# EAGLE board ESE323- 100kHz Oscilloscope Project (EAGLE 9.7.0)
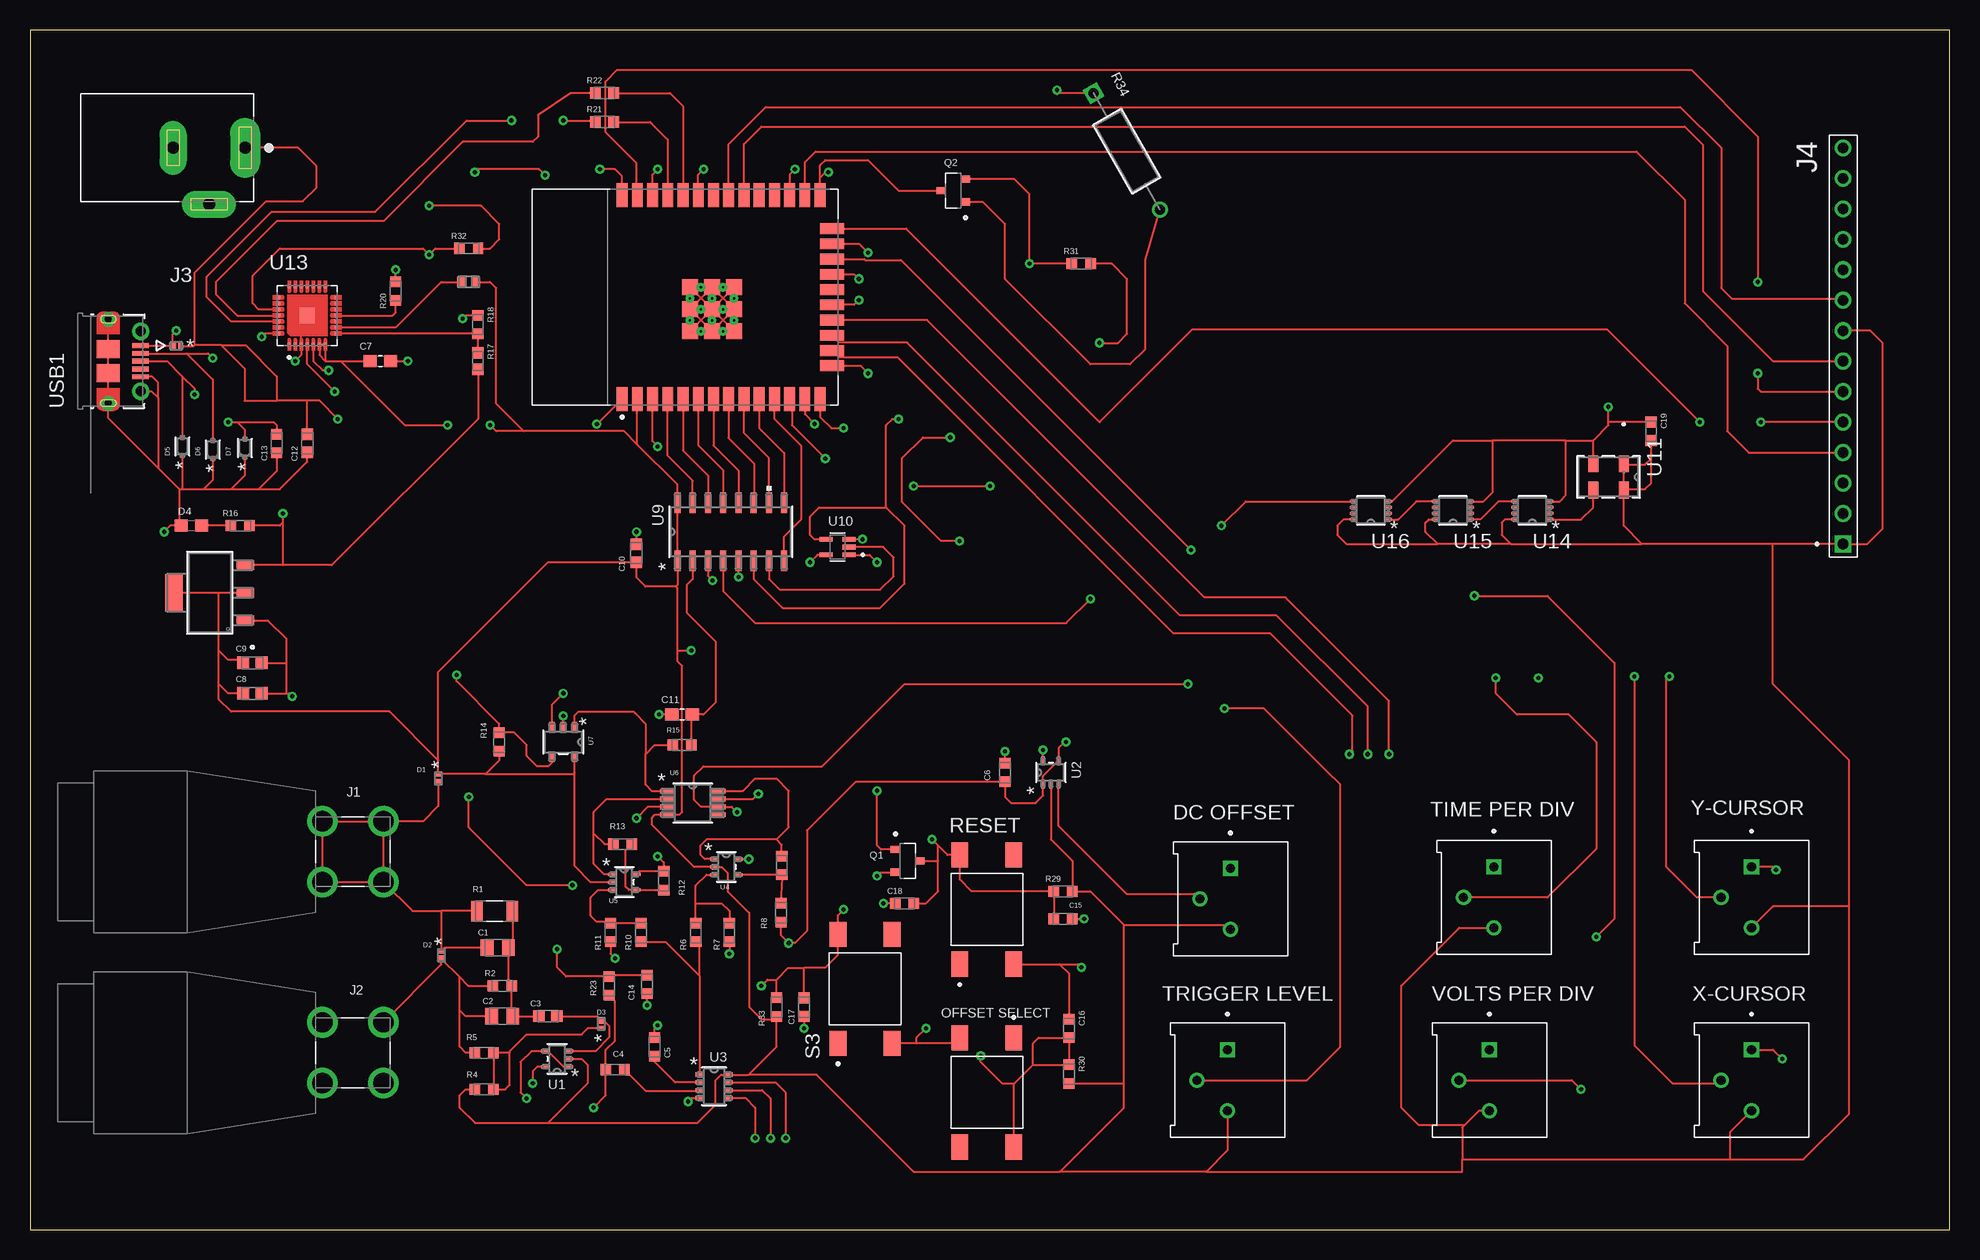
[diagram p0: board, top side]
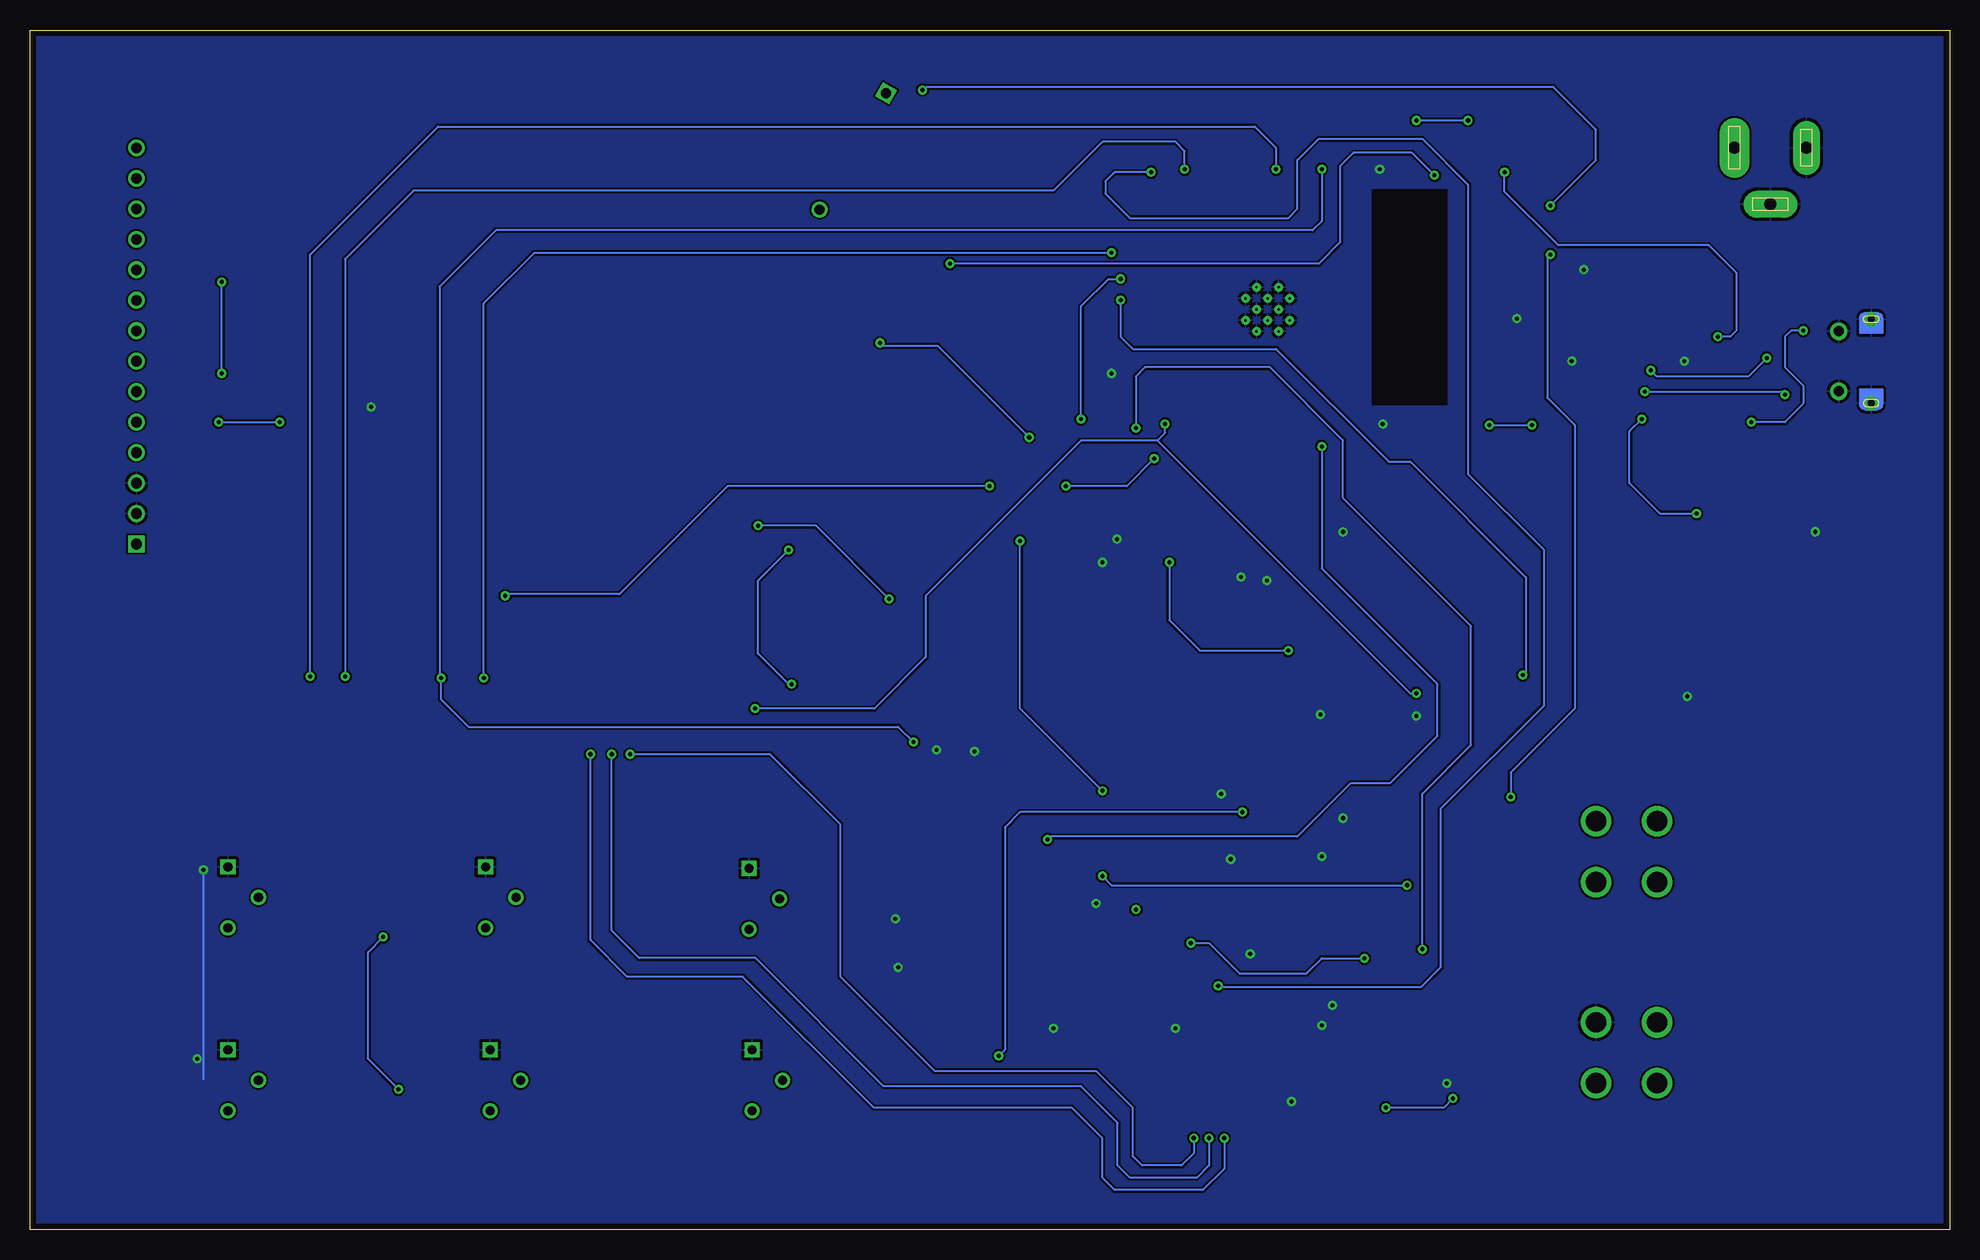
[diagram p1: board, bottom side, seen from below]

Size 160 x 100 mm. Coordinates in mm from the lower left corner, seen from the top.
Outline: 0,0 160,0 160,100 0,100 0,0
Copper layers (1*16): Top / Bottom
Stack-up Default Layer Stack: Top User Defined 0.035mm / Dielectric-1 User Defined 1.5mm / Bottom User Defined 0.035mm
Design rules: minimum copper width 6mil, minimum drill size 6mil, copper clearance wire_polygon to wire_polygon 6mil, copper clearance wire_polygon to pad_smd 6mil, copper clearance wire_polygon to via 6mil, copper clearance pad_smd to pad_smd 6mil, copper clearance pad_smd to via 6mil, copper clearance via to via 6mil, copper clearance smd to pad (same net) 6mil, copper clearance smd to via (same net) 6mil, copper clearance smd to smd (same net) 6mil, dimension clearance 20mil, restrict clearance 0mil, drill distance 6mil, keepout clearance 0mil

## Footprints (pad centres in the part's own frame; a part is rotated, then mirrored left to right if it is on the bottom)
GRM2165C2A102JA01D = smd 1.05 x 1.38: 1 -0.888,0; 2 0.888,0
GRM2195C1H912JA01D = smd 1.05 x 1.38: 1 -0.888,0; 2 0.888,0
GRM188R61A106ME69D = smd 0.96 x 0.97: 1 -0.755,0; 2 0.755,0
GCJ188R71H104KA12D = smd 0.89 x 0.93: 1 -0.77,0; 2 0.77,0
CAPC1608X90 = smd 1.1 x 1: 1 -0.85,0; 2 0.85,0
GRM188R60J476ME15J = smd 1 x 1.02: 1 -0.759,0; 2 0.759,0
CC0603JRNPO9BN501 = smd 1.1 x 1: 1 -0.85,0; 2 0.85,0
CR_NSR05_ONS-L = smd 0.406 x 0.508: 1 -0.368,0 | smd 0.559 x 0.508: 2 0.292,0
LTST-C191KRKT-0603 = smd 1.1 x 1: 1 -0.85,0; 2 0.85,0
D5V0L1B2T_7-SOD523_DIO-L = smd 0.402 x 0.299: 1 -0.751,0; 2 0.751,0
CALTEST_CT3151-2 = drill 1.7: 1 -2.54,2.54; 2 2.54,2.54; 3 -2.54,-2.54; 4 2.54,-2.54
CALTEST_CT3151-0 = drill 1.7: 1 -2.54,2.54; 2 2.54,2.54; 3 -2.54,-2.54; 4 2.54,-2.54
CUI_PJ-202A = drill 1 pad 2.5 long: 1 -6.5,0 | drill 1 pad 2.25 long: 2 -0.5,0; 3 -3.5,4.7
PPTC141LFBN-RC = drill 0.89 square: 1 -5.08,0 | drill 0.89: 2 -2.54,0; 3 0,0; 4 2.54,0; 5 5.08,0; 6 7.62,0; 7 10.16,0; 8 12.7,0; 9 15.24,0; 10 17.78,0; 11 20.32,0; 12 22.86,0; 13 25.4,0; 14 27.94,0
TRANS_SS8050-G = smd 0.8 x 0.6: 1 -1.01,0.95; 2 -1.01,-0.95; 3 1.01,0
RT1206CRE07900KL = smd 0.97 x 1.73: 1 -1.48,0; 2 1.48,0
ESR03EZPJ103 = smd 0.87 x 0.93: 1 -0.78,0; 2 0.78,0
TRIM_3386P-1-101TLF = drill 0.76 square: 1 -2.54,-0.015 | drill 0.76: 2 0,-2.555; 3 2.54,-0.015
ESR03EZPJ202 = smd 0.87 x 0.93: 1 -0.78,0; 2 0.78,0
RNCP0603FTD22K1 = smd 0.97 x 0.93: 1 -0.68,0; 2 0.68,0
RNCF0603DTE47K5 = smd 0.87 x 0.93: 1 -0.755,0; 2 0.755,0
STA_RNCP0603_STP-L = smd 0.711 x 0.838: 1 -0.597,0; 2 0.597,0
RMCF0603ZT0R00 = smd 0.9 x 0.97: 1 -0.76,0; 2 0.76,0
STA_CD14_STP = drill 0.838 pad 1.346 square: 1 0,0 | drill 0.838 pad 1.346: 2 11.176,0
SW_TS04-66-50-BK-260-SMT = smd 2.1 x 1.4: 1 -4.55,2.25; 2 -4.55,-2.25; 3 4.55,2.25; 4 4.55,-2.25
AD8565-L = smd 0.673 x 0.254: 1 -1.01,0.65; 2 -1.01,0; 3 -1.01,-0.65; 4 1.01,-0.65; 5 1.01,0.65
LTC6910-4-TSOT-23-L = smd 0.673 x 0.356: 1 -1.213,0.975; 2 -1.213,0.325; 3 -1.213,-0.325; 4 -1.213,-0.975; 5 1.213,-0.975; 6 1.213,-0.325; 7 1.213,0.325; 8 1.213,0.975
ADG1419-L = smd 1.206 x 0.4: 1 -2.124,0.975; 2 -2.124,0.325; 3 -2.124,-0.325; 4 -2.124,-0.975; 5 2.124,-0.975; 6 2.124,-0.325; 7 2.124,0.325; 8 2.124,0.975
LMV331-L = smd 0.802 x 0.449: 1 -1.251,0.95; 2 -1.251,0; 3 -1.251,-0.95; 4 1.251,-0.95; 5 1.251,0.95
AZ1117CH-3.3TRG1-SOT-223_DIO-L = smd 0.8 x 1.456: 1 -2.3,-2.974; 2 0,-2.974; 3 2.3,-2.974 | smd 3.1 x 1.456: 4 0,2.974
AD7819-L = smd 1.676 x 0.508: 1 -2.413,4.445; 2 -2.413,3.175; 3 -2.413,1.905; 4 -2.413,0.635; 5 -2.413,-0.635; 6 -2.413,-1.905; 7 -2.413,-3.175; 8 -2.413,-4.445; 9 2.413,-4.445; 10 2.413,-3.175; 11 2.413,-1.905; 12 2.413,-0.635; 13 2.413,0.635; 14 2.413,1.905; 15 2.413,3.175; 16 2.413,4.445
SN74LVC1G125DCKR-SOT65P210X110-5N = smd 1.19 x 0.4: 1 -0.96,0.65; 2 -0.96,0; 3 -0.96,-0.65; 4 0.96,-0.65; 5 0.96,0.65
CDFN4_5X3P2_MCH-L = smd 1.403 x 0.849: 1 -1.102,1.27; 2 -1.102,-1.27; 3 1.102,-1.27; 4 1.102,1.27
MODULE_ESP32-WROOM-32 = smd 2 x 0.9: 1 -8.5,5.26; 2 -8.5,3.99; 3 -8.5,2.72; 4 -8.5,1.45; 5 -8.5,0.18; 6 -8.5,-1.09; 7 -8.5,-2.36; 8 -8.5,-3.63; 9 -8.5,-4.9; 10 -8.5,-6.17; 11 -8.5,-7.44; 12 -8.5,-8.71; 13 -8.5,-9.98; 14 -8.5,-11.25; 25 8.5,-11.25; 26 8.5,-9.98; 27 8.5,-8.71; 28 8.5,-7.44; 29 8.5,-6.17; 30 8.5,-4.9; 31 8.5,-3.63; 32 8.5,-2.36; 33 8.5,-1.09; 34 8.5,0.18; 35 8.5,1.45; 36 8.5,2.72; 37 8.5,3.99; 38 8.5,5.26 | smd 0.9 x 2: 15 -5.715,-12.25; 16 -4.445,-12.25; 17 -3.175,-12.25; 18 -1.905,-12.25; 19 -0.635,-12.25; 20 0.635,-12.25; 21 1.905,-12.25; 22 3.175,-12.25; 23 4.445,-12.25; 24 5.715,-12.25 | smd 1.33 x 1.33: 39_1 -2.835,-0.405; 39_2 -1,-0.405; 39_3 0.835,-0.405; 39_4 -2.835,-2.24; 39_5 -1,-2.24; 39_6 0.835,-2.24; 39_7 -2.835,-4.075; 39_8 -1,-4.075; 39_9 0.835,-4.075 | drill 0.2 pad 0.3: 39_10 -1.917,-0.405; 39_11 -0.083,-0.405; 39_12 -2.835,-1.323; 39_13 -1,-1.323; 39_14 0.835,-1.323; 39_15 -1.917,-2.24; 39_16 -0.083,-2.24; 39_17 -2.835,-3.158; 39_18 -1,-3.158; 39_19 0.835,-3.158; 39_20 -1.917,-4.075; 39_21 -0.083,-4.075
IC_CP2102N-A02-GQFN28R = smd 0.25 x 0.25: 1 -2.4,1.5; 2 -2.4,1; 3 -2.4,0.5; 4 -2.4,0; 5 -2.4,-0.5; 6 -2.4,-1; 7 -2.4,-1.5; 8 -1.5,-2.4; 9 -1,-2.4; 10 -0.5,-2.4; 11 0,-2.4; 12 0.5,-2.4; 13 1,-2.4; 14 1.5,-2.4; 15 2.4,-1.5; 16 2.4,-1; 17 2.4,-0.5; 18 2.4,0; 19 2.4,0.5; 20 2.4,1; 21 2.4,1.5; 22 1.5,2.4; 23 1,2.4; 24 0.5,2.4; 25 0,2.4; 26 -0.5,2.4; 27 -1,2.4; 28 -1.5,2.4 | smd 1.27 x 1.27: 29 0,0
DCU8-L = smd 0.559 x 0.203: 1 -1.473,0.75; 2 -1.473,0.25; 3 -1.473,-0.25; 4 -1.473,-0.75; 5 1.473,-0.75; 6 1.473,-0.25; 7 1.473,0.25; 8 1.473,0.75
MOLEX_1050170001 = smd 0.4 x 1.35: 1 -1.3,4.125; 2 -0.65,4.125; 3 0,4.125; 4 0.65,4.125; 5 1.3,4.125 | drill 0.85 pad 1.45: SH1 -2.5,4.15; SH2 2.5,4.15 | drill 0.6 pad 1.2: SH3 -3.5,1.45; SH6 3.5,1.45 | smd 1.5 x 1.9: SH4 -1,1.45; SH5 1,1.45

## Placement (x,y rotation side)
C1  GRM2165C2A102JA01D  [GRM2165C2A102JA01D]  38.99,23.5 0 top
C2  GRM2195C1H912JA01D  [GRM2195C1H912JA01D]  39.37,17.78 0 top
C3  GRM188R61A106ME69D  [GRM188R61A106ME69D]  43.18,17.78 0 top
C4  GCJ188R71H104KA12D  [GCJ188R71H104KA12D]  48.77,13.34 0 top
C5  GRT188R61H105KE13D  [GCJ188R71H104KA12D]  52.07,15.24 270 top
C6  GCJ188R71H104KA12D  [GCJ188R71H104KA12D]  81.28,38.1 270 top
C7  C0603C475K9PACTU  [CAPC1608X90]  29.21,72.39 0 top
C8  GRM188R60J476ME15J  [GRM188R60J476ME15J]  18.54,44.7 180 top
C9  GRM188R60J476ME15J  [GRM188R60J476ME15J]  18.54,47.24 180 top
C10  GRM188R61A106ME69D  [GRM188R61A106ME69D]  50.55,56.39 270 top
C11  CC0603JRNPO9BN501  [CC0603JRNPO9BN501]  54.36,42.93 0 top
C12  GRM188R61A106ME69D  [GRM188R61A106ME69D]  23.11,65.53 90 top
C13  GCJ188R71H104KA12D  [GCJ188R71H104KA12D]  20.57,65.53 90 top
C14  GCJ188R71H104KA12D  [GCJ188R71H104KA12D]  51.44,20.45 90 top
C15  GCJ188R71H104KA12D  [GCJ188R71H104KA12D]  86.11,25.91 180 top
C16  GCJ188R71H104KA12D  [GCJ188R71H104KA12D]  86.61,16.76 270 top
C17  GCJ188R71H104KA12D  [GCJ188R71H104KA12D]  64.52,18.54 90 top
C18  GCJ188R71H104KA12D  [GCJ188R71H104KA12D]  72.9,27.18 0 top
C19  GCJ188R71H104KA12D  [GCJ188R71H104KA12D]  135.13,66.55 270 top
D1  NSR05F40NXT5GCR_NSR05_ONS-L  [CR_NSR05_ONS-L]  34.04,37.59 270 top
D2  NSR05F40NXT5GCR_NSR05_ONS-L  [CR_NSR05_ONS-L]  34.29,22.86 270 top
D3  NSR05F40NXT5GCR_NSR05_ONS-L  [CR_NSR05_ONS-L]  47.62,17.14 90 top
D4  LTST-C191KRKT  [LTST-C191KRKT-0603]  13.46,58.67 0 top
D5  D5V0L1B2T-7SOD523_DIO-L  [D5V0L1B2T_7-SOD523_DIO-L]  12.7,65.28 90 top
D6  D5V0L1B2T-7SOD523_DIO-L  [D5V0L1B2T_7-SOD523_DIO-L]  15.24,65.02 90 top
D7  D5V0L1B2T-7SOD523_DIO-L  [D5V0L1B2T_7-SOD523_DIO-L]  17.91,65.15 90 top
D8  NSR05F40NXT5GCR_NSR05_ONS-L  [CR_NSR05_ONS-L]  12.19,73.66 180 top
J1  CT3151-2  [CALTEST_CT3151-2]  26.92,31.5 270 top
J2  CT3151-0  [CALTEST_CT3151-0]  26.92,14.73 270 top
J3  PJ-202A  [CUI_PJ-202A]  11.43,90.17 180 top
J4  PPTC141LFBN-RC  [PPTC141LFBN-RC]  151.13,62.23 90 top
Q1  SS8050-G  [TRANS_SS8050-G]  73.15,30.73 0 top
Q2  SS8050-G  [TRANS_SS8050-G]  76.96,86.61 180 top
R1  RT1206CRE07900KL  [RT1206CRE07900KL]  38.73,26.54 0 top
R2  ESR03EZPJ104  [ESR03EZPJ103]  39.37,20.32 0 top
R3  3386P-1-101TLF  [TRIM_3386P-1-101TLF]  100.08,27.56 270 top
R4  ESR03EZPJ103  [ESR03EZPJ103]  37.85,11.68 180 top
R5  ESR03EZPJ103  [ESR03EZPJ103]  37.85,14.73 0 top
R6  ESR03EZPJ103  [ESR03EZPJ103]  55.5,24.77 90 top
R7  ESR03EZPJ103  [ESR03EZPJ103]  58.29,24.77 90 top
R8  ESR03EZPJ103  [ESR03EZPJ103]  62.61,26.42 90 top
R9  ESR03EZPJ103  [ESR03EZPJ103]  62.67,30.35 90 top
R10  ESR03EZPJ103  [ESR03EZPJ103]  50.93,24.77 90 top
R11  ESR03EZPJ103  [ESR03EZPJ103]  48.39,24.77 90 top
R12  ESR03EZPJ103  [ESR03EZPJ103]  52.83,29.08 270 top
R13  ESR03EZPJ103  [ESR03EZPJ103]  49.4,32.13 180 top
R14  RT0603DRE075K1L  [ESR03EZPJ103]  39.12,40.64 270 top
R15  ESR03EZPJ302  [ESR03EZPJ103]  54.36,40.39 0 top
R16  ESR03EZPJ202  [ESR03EZPJ202]  17.53,58.67 0 top
R17  RNCP0603FTD22K1  [RNCP0603FTD22K1]  37.34,72.39 270 top
R18  RNCF0603DTE47K5  [RNCF0603DTE47K5]  37.34,75.44 270 top
R19  RNCP0603FTD1K00STA_RNCP0603_STP-L  [STA_RNCP0603_STP-L]  36.58,78.99 0 top
R20  ESR03EZPJ103  [ESR03EZPJ103]  30.48,78.23 90 top
R21  RMCF0603ZT0R00  [RMCF0603ZT0R00]  47.88,92.33 0 top
R22  RMCF0603ZT0R00  [RMCF0603ZT0R00]  47.88,94.74 0 top
R23  ESR03EZPJ104  [ESR03EZPJ103]  48.26,20.32 270 top
R24  3386P-1-101TLF  [TRIM_3386P-1-101TLF]  121.67,12.45 270 top
R25  3386P-1-101TLF  [TRIM_3386P-1-101TLF]  122.05,27.69 270 top
R26  3386P-1-101TLF  [TRIM_3386P-1-101TLF]  99.82,12.45 270 top
R27  3386P-1-101TLF  [TRIM_3386P-1-101TLF]  143.51,12.45 270 top
R28  3386P-1-101TLF  [TRIM_3386P-1-101TLF]  143.51,27.69 270 top
R29  ESR03EZPJ103  [ESR03EZPJ103]  86.11,28.19 0 top
R30  ESR03EZPJ103  [ESR03EZPJ103]  86.61,12.95 270 top
R31  ESR03EZPJ103  [ESR03EZPJ103]  87.63,80.52 0 top
R32  ESR03EZPJ103  [ESR03EZPJ103]  36.58,81.79 0 top
R33  ESR03EZPJ103  [ESR03EZPJ103]  62.23,18.54 270 top
R34  CD14ZT0R00STA_CD14_STP  [STA_CD14_STP]  88.65,94.74 299.7 top
RESET  TS04-66-50-BK-260-SMT  [SW_TS04-66-50-BK-260-SMT]  79.76,26.67 90 top
S2  TS04-66-50-BK-260-SMT  [SW_TS04-66-50-BK-260-SMT]  79.76,11.43 270 top
S3  TS04-66-50-BK-260-SMT  [SW_TS04-66-50-BK-260-SMT]  69.6,20.07 90 top
U1  AD8565AKSZ-REEL7KS_5_ADI-L  [AD8565-L]  43.94,14.22 180 top
U2  AD8565AKSZ-REEL7KS_5_ADI-L  [AD8565-L]  85.09,38.1 90 top
U3  LTC6910-3CTS8TRMPBFTSOT-23_TS8_LIT-L  [LTC6910-4-TSOT-23-L]  57.02,11.94 0 top
U4  AD8565AKSZ-REEL7KS_5_ADI-L  [AD8565-L]  58.04,30.23 0 top
U5  AD8565AKSZ-REEL7KS_5_ADI-L  [AD8565-L]  49.53,28.96 0 top
U6  ADG1419BRMZ-REEL7RM_8_ADI-L  [ADG1419-L]  55.24,35.56 0 top
U7  LMV331W5-7SOT25_DIO-L  [LMV331-L]  44.45,40.64 270 top
U8  AZ1117CH-3.3TRG1SOT-223_DIO-L  [AZ1117CH-3.3TRG1-SOT-223_DIO-L]  14.99,53.09 90 top
U9  AD7819YRZR_16_ADI-L  [AD7819-L]  58.42,58.17 90 top
U10  SN74LVC1G125DCKR  [SN74LVC1G125DCKR-SOT65P210X110-5N]  67.31,56.9 180 top
U11  DSC1001BE2-001.6000CDFN4_5X3P2_MCH-L  [CDFN4_5X3P2_MCH-L]  131.57,62.74 270 top
U12  ESP32-WROOM-32  [MODULE_ESP32-WROOM-32]  54.61,77.72 90 top
U13  CP2102N-A02-GQFN28R  [IC_CP2102N-A02-GQFN28R]  23.11,76.2 90 top
U14  SN74LVC2G74DCURDCU8-L  [DCU8-L]  125.22,59.94 180 top
U15  SN74LVC2G74DCURDCU8-L  [DCU8-L]  118.62,59.94 180 top
U16  SN74LVC2G74DCURDCU8-L  [DCU8-L]  111.76,59.94 180 top
USB1  1050170001  [MOLEX_1050170001]  5.08,72.39 270 top

## Library data of the parts
C1 = ESE323_Project_Library; CHECK_PRICES: https://www.snapeda.com/parts/GRM2165C2A102JA01D/Murata+Electronics+North+America/view-part/?ref=eda; DESCRIPTION: 0805 1000 pF 100 V ±5% Tolerance C0G Multilayer Ceramic Capacitor; DIGIKEY_PART_NUMBER: 490-6445-2-ND; MF: Murata Electronics; MP: GRM2165C2A102JA01D; PACKAGE: 2012 Murata; PURCHASE-URL: https://www.snapeda.com/api/url_track_click_mouser/?unipart_id=1837721&manufacturer=Murata Electronics&part_name=GRM2165C2A102JA01D&search_term=None; SNAPEDA_LINK: https://www.snapeda.com/parts/GRM2165C2A102JA01D/Murata+Electronics+North+America/view-part/?ref=snap
C2 J2 R1 R2 R4-R13 R20 R23 R29-R33 = ESE323_Project_Library
C3 C10 C12 = ESE323_Project_Library; CHECK_PRICES: https://www.snapeda.com/parts/GRM188R61A106ME69D/Murata+Electronics+North+America/view-part/?ref=eda; DESCRIPTION: SMD capacitor X5R(EIA) with capacitance 10uF Tol.20%. Rated voltage 10Vdc 85C; DIGIKEY_PART_NUMBER: 490-10475-2-ND; MF: Murata; MP: GRM188R61A106ME69D; PACKAGE: 1608 Murata; PURCHASE-URL: https://www.snapeda.com/api/url_track_click_mouser/?unipart_id=589707&manufacturer=Murata&part_name=GRM188R61A106ME69D&search_term=None; SNAPEDA_LINK: https://www.snapeda.com/parts/GRM188R61A106ME69D/Murata+Electronics+North+America/view-part/?ref=snap
C4 C6 C13-C19 = ESE323_Project_Library; CHECK_PRICES: https://www.snapeda.com/parts/GCJ188R71H104KA12D/Murata+Electronics+North+America/view-part/?ref=eda; DESCRIPTION: 0.1 µF ±10% 50V Ceramic Capacitor X7R 0603 (1608 Metric); DIGIKEY_PART_NUMBER: 490-5798-2-ND; MF: Murata Electronics; MP: GCJ188R71H104KA12D; PACKAGE: 1608 Murata; PURCHASE-URL: https://www.snapeda.com/api/url_track_click_mouser/?unipart_id=667734&manufacturer=Murata Electronics&part_name=GCJ188R71H104KA12D&search_term=None; SNAPEDA_LINK: https://www.snapeda.com/parts/GCJ188R71H104KA12D/Murata+Electronics+North+America/view-part/?ref=snap
C5 = ESE323_Project_Library; CHECK_PRICES: https://www.snapeda.com/parts/GRT188R61H105KE13D/Murata+Electronics+North+America/view-part/?ref=eda; DESCRIPTION: 1 µF ±10% 50V Ceramic Capacitor X5R 0603 (1608 Metric); DIGIKEY_PART_NUMBER: 490-12330-2-ND; MF: Murata; MP: GRT188R61H105KE13D; PACKAGE: 1608 Murata; PURCHASE-URL: https://www.snapeda.com/api/url_track_click_mouser/?unipart_id=1767599&manufacturer=Murata&part_name=GRT188R61H105KE13D&search_term=None; SNAPEDA_LINK: https://www.snapeda.com/parts/GRT188R61H105KE13D/Murata+Electronics+North+America/view-part/?ref=snap
C7 = ESE323_Project_Library; CHECK_PRICES: https://www.snapeda.com/parts/C0603C475K9PACTU/KEMET/view-part/?ref=eda; DESCRIPTION: 0603 C 4.7uF Ceramic Multilayer Capacitor, 6.3 VDC, +85degC, X5R Dielec, +/-10% | KEMET C0603C475K9PACTU; MF: KEMET; MP: C0603C475K9PACTU; PACKAGE: 0603 Kemet; SNAPEDA_LINK: https://www.snapeda.com/parts/C0603C475K9PACTU/KEMET/view-part/?ref=snap
C8 C9 = ESE323_Project_Library; CHECK_PRICES: https://www.snapeda.com/parts/GRM188R60J476ME15J/Murata/view-part/?ref=eda; DESCRIPTION: SMD capacitor X5R(EIA) with capacitance 47uF Tol.20%. Rated voltage 6.3Vdc 85C; DIGIKEY_PART_NUMBER: 490-GRM188R60J476ME15JTR-ND; MF: Murata; MP: GRM188R60J476ME15J; PACKAGE: 1608 Murata; PURCHASE-URL: https://www.snapeda.com/api/url_track_click_mouser/?unipart_id=1988705&manufacturer=Murata&part_name=GRM188R60J476ME15J&search_term=None; SNAPEDA_LINK: https://www.snapeda.com/parts/GRM188R60J476ME15J/Murata/view-part/?ref=snap
C11 = ESE323_Project_Library; CHECK_PRICES: https://www.snapeda.com/parts/CC0603JRNPO9BN501/Yageo/view-part/?ref=eda; DESCRIPTION: 500 pF ±5% 50V Ceramic Capacitor C0G, NP0 0603 (1608 Metric); DIGIKEY_PART_NUMBER: 13-CC0603JRNPO9BN501TR-ND; MF: Yageo; MP: CC0603JRNPO9BN501; PACKAGE: 0603 Yageo; PURCHASE-URL: https://www.snapeda.com/api/url_track_click_mouser/?unipart_id=1822519&manufacturer=Yageo&part_name=CC0603JRNPO9BN501&search_term=None; SNAPEDA_LINK: https://www.snapeda.com/parts/CC0603JRNPO9BN501/Yageo/view-part/?ref=snap
D1-D3 D8 = ESE323_Project_Library; COPYRIGHT: Copyright (C) 2023 Ultra Librarian. All rights reserved.; MANUFACTURER_PART_NUMBER: NSR05F40NXT5G; MFR_NAME: onsemi
D4 = ESE323_Project_Library; CHECK_PRICES: https://www.snapeda.com/parts/LTST-C191KRKT/Lite-On+Inc./view-part/?ref=eda; DESCRIPTION: Red 631nm LED Indication - Discrete 2V 0603 (1608 Metric); DIGIKEY_PART_NUMBER: 160-1447-2-ND; MF: Lite-On Inc.; MP: LTST-C191KRKT; PACKAGE: 0603 Lite-On Inc.; PURCHASE-URL: https://www.snapeda.com/api/url_track_click_mouser/?unipart_id=234319&manufacturer=Lite-On Inc.&part_name=LTST-C191KRKT&search_term=None; SNAPEDA_LINK: https://www.snapeda.com/parts/LTST-C191KRKT/Lite-On+Inc./view-part/?ref=snap
D5-D7 = ESE323_Project_Library; COPYRIGHT: Copyright (C) 2023 Ultra Librarian. All rights reserved.; MANUFACTURER_PART_NUMBER: D5V0L1B2T-7; MFR_NAME: Diodes Inc
J1 = ESE323_Project_Library; CHECK_PRICES: https://www.snapeda.com/parts/CT3151-2/Cal+Test+Electronics/view-part/?ref=eda; DESCRIPTION: Banana Jack Connector Standard Banana Solder Red; DIGIKEY_PART_NUMBER: BKCT3151-2-ND; MF: Cal Test; MP: CT3151-2; PACKAGE: None; PURCHASE-URL: https://www.snapeda.com/api/url_track_click_mouser/?unipart_id=552573&manufacturer=Cal Test&part_name=CT3151-2&search_term=None; SNAPEDA_LINK: https://www.snapeda.com/parts/CT3151-2/Cal+Test+Electronics/view-part/?ref=snap
J3 = ESE323_Project_Library; CHECK_PRICES: https://www.snapeda.com/parts/PJ-202A/CUI+Devices/view-part/?ref=eda; CUI_PURCHASE_URL: https://www.cuidevices.com/product/interconnect/connectors/dc-power-connectors/jacks/pj-202a?utm_source=snapeda.com&utm_medium=referral&utm_campaign=snapedaBOM; DESCRIPTION: 2.0 x 6.5 mm, 2.5 A, Horizontal, Through Hole, Kinked Pins, Dc Power Jack Connector; DIGIKEY_PART_NUMBER: CP-202A-ND; MF: CUI Devices; MP: PJ-202A; PACKAGE: None; PURCHASE-URL: https://www.snapeda.com/api/url_track_click_mouser/?unipart_id=153805&manufacturer=CUI Devices&part_name=PJ-202A&search_term=None; SNAPEDA_LINK: https://www.snapeda.com/parts/PJ-202A/CUI+Devices/view-part/?ref=snap
J4 = ESE323_Project_Library; AVAILABILITY: In Stock; CENTERLINE_PITCH: 2.54 mm[.1 in]; CHECK_PRICES: https://www.snapeda.com/parts/5-146280-5/TE+Connectivity+AMP+Connectors/view-part/?ref=eda; COMMENT: 5-146280-5; DESCRIPTION: Conn Unshrouded Header HDR 5 POS 2.54mm Solder ST Thru-Hole Carton; EU_ROHS_COMPLIANCE: Compliant; MF: TE Connectivity; MP: 5-146280-5; NUMBER_OF_POSITIONS: 5; PACKAGE: None; PRICE: None; PRODUCT_TYPE: Connector; PURCHASE-URL: https://www.snapeda.com/api/url_track_click_mouser/?unipart_id=700092&manufacturer=TE Connectivity&part_name=5-146280-5&search_term=None; SNAPEDA_LINK: https://www.snapeda.com/parts/5-146280-5/TE+Connectivity+AMP+Connectors/view-part/?ref=snap
Q1 Q2 = ESE323_Project_Library; CHECK_PRICES: https://www.snapeda.com/parts/SS8050-G/Comchip+Technology/view-part/?ref=eda; DESCRIPTION: Bipolar (BJT) Transistor NPN 25 V 1.5 A 100MHz 300 mW Surface Mount SOT-23-3; DIGIKEY_PART_NUMBER: 641-1790-2-ND; MF: Comchip Technology; MP: SS8050-G; PACKAGE: TO-236 Comchip; PURCHASE-URL: https://www.snapeda.com/api/url_track_click_mouser/?unipart_id=809142&manufacturer=Comchip Technology&part_name=SS8050-G&search_term=None; SNAPEDA_LINK: https://www.snapeda.com/parts/SS8050-G/Comchip+Technology/view-part/?ref=snap
R3 R24-R28 = ESE323_Project_Library; MANUFACTURER: Bourns; MAXIMUM_PACKAGE_HEIGHT: 4.83 mm; PARTREV: 08/19; SNAPEDA_PN: 3386P-1-101TLF; STANDARD: IPC 7351B
R14 = ESE323_Project_Library; CHECK_PRICES: https://www.snapeda.com/parts/RT0603DRE075K1L/Yageo/view-part/?ref=eda; DESCRIPTION: Res Thin Film 0603 5.1K Ohm 0.5% 0.1W(1/10W) ±50ppm/°C Pad SMD T/R; DIGIKEY_PART_NUMBER: 311-2632-2-ND; MF: Yageo; MP: RT0603DRE075K1L; PACKAGE: 1608 Yageo; PURCHASE-URL: https://www.snapeda.com/api/url_track_click_mouser/?unipart_id=3854407&manufacturer=Yageo&part_name=RT0603DRE075K1L&search_term=None; SNAPEDA_LINK: https://www.snapeda.com/parts/RT0603DRE075K1L/Yageo/view-part/?ref=snap
R15 = ESE323_Project_Library; CHECK_PRICES: https://www.snapeda.com/parts/ESR03EZPJ302/Rohm/view-part/?ref=eda; DESCRIPTION: 3 kOhms ±5% 0.25W, 1/4W Chip Resistor 0603 (1608 Metric) Automotive AEC-Q200, Pulse Withstanding Thick Film; DIGIKEY_PART_NUMBER: RHM3KDTR-ND; MF: Rohm; MP: ESR03EZPJ302; PACKAGE: 1608 Rohm Semiconductor; PURCHASE-URL: https://www.snapeda.com/api/url_track_click_mouser/?unipart_id=975412&manufacturer=Rohm&part_name=ESR03EZPJ302&search_term=None; SNAPEDA_LINK: https://www.snapeda.com/parts/ESR03EZPJ302/Rohm/view-part/?ref=snap
R16 = ESE323_Project_Library; CHECK_PRICES: https://www.snapeda.com/parts/ESR03EZPJ202/Rohm/view-part/?ref=eda; DESCRIPTION: 2 kOhms ±5% 0.25W, 1/4W Chip Resistor 0603 (1608 Metric) Automotive AEC-Q200, Pulse Withstanding Thick Film; DIGIKEY_PART_NUMBER: RHM2.0KDTR-ND; MF: Rohm; MP: ESR03EZPJ202; PACKAGE: 1608 Rohm Semiconductor; PURCHASE-URL: https://www.snapeda.com/api/url_track_click_mouser/?unipart_id=978373&manufacturer=Rohm&part_name=ESR03EZPJ202&search_term=None; SNAPEDA_LINK: https://www.snapeda.com/parts/ESR03EZPJ202/Rohm/view-part/?ref=snap
R17 = ESE323_Project_Library; CHECK_PRICES: https://www.snapeda.com/parts/RNCP0603FTD22K1/Stackpole+Electronics+Inc/view-part/?ref=eda; DESCRIPTION: Res Thin Film 0603 22.1K Ohm 1% 0.125W(1/8W) ±100ppm/°C Sulfur Resistant Pad SMD T/R; DIGIKEY_PART_NUMBER: RNCP0603FTD22K1TR-ND; MF: Stackpole Electronics Inc; MP: RNCP0603FTD22K1; PACKAGE: 1508 Stackpole; PURCHASE-URL: https://www.snapeda.com/api/url_track_click_mouser/?unipart_id=3989807&manufacturer=Stackpole Electronics Inc&part_name=RNCP0603FTD22K1&search_term=None; SNAPEDA_LINK: https://www.snapeda.com/parts/RNCP0603FTD22K1/Stackpole+Electronics+Inc/view-part/?ref=snap
R18 = ESE323_Project_Library; CHECK_PRICES: https://www.snapeda.com/parts/RNCF0603DTE47K5/Stackpole+Electronics+Inc/view-part/?ref=eda; DESCRIPTION: RES 47.5K OHM 0.5% 1/10W 0603; DIGIKEY_PART_NUMBER: 738-RNCF0603DTE47K5TR-ND; MF: Stackpole Electronics Inc; MP: RNCF0603DTE47K5; PACKAGE: 1508 Stackpole; PURCHASE-URL: https://www.snapeda.com/api/url_track_click_mouser/?unipart_id=3965254&manufacturer=Stackpole Electronics Inc&part_name=RNCF0603DTE47K5&search_term=None; SNAPEDA_LINK: https://www.snapeda.com/parts/RNCF0603DTE47K5/Stackpole+Electronics+Inc/view-part/?ref=snap
R19 = ESE323_Project_Library; COPYRIGHT: Copyright (C) 2023 Ultra Librarian. All rights reserved.; MANUFACTURER_PART_NUMBER: RNCP0603FTD1K00; MFR_NAME: Stackpole International
R21 R22 = ESE323_Project_Library; CHECK_PRICES: https://www.snapeda.com/parts/RMCF0603ZT0R00/Stackpole+Electronics+Inc/view-part/?ref=eda; DESCRIPTION: 0 Ohms Jumper 0.1W, 1/10W Chip Resistor 0603 (1608 Metric) Automotive AEC-Q200 Thick Film; DIGIKEY_PART_NUMBER: RMCF0603ZT0R00TR-ND; MF: Stackpole Electronics; MP: RMCF0603ZT0R00; PACKAGE: 0603 Stackpole Electronics; PURCHASE-URL: https://www.snapeda.com/api/url_track_click_mouser/?unipart_id=483594&manufacturer=Stackpole Electronics&part_name=RMCF0603ZT0R00&search_term=None; SNAPEDA_LINK: https://www.snapeda.com/parts/RMCF0603ZT0R00/Stackpole+Electronics+Inc/view-part/?ref=snap
R34 = ESE323_Project_Library; COPYRIGHT: Copyright (C) 2023 Ultra Librarian. All rights reserved.; MANUFACTURER_PART_NUMBER: CD14ZT0R00; MFR_NAME: Stackpole International
RESET S2 S3 = ESE323_Project_Library; CHECK_PRICES: https://www.snapeda.com/parts/TS04-66-50-BK-260-SMT/CUI+Devices/view-part/?ref=eda; CUI_PURCHASE_URL: https://www.cuidevices.com/product/switches/tactile-switches/ts04-66-50-bk-260-smt?utm_source=snapeda.com&utm_medium=referral&utm_campaign=snapedaBOM; DESCRIPTION: 6 x 6 mm, 5 mm Actuator Height, 260 gf, Black, Surface Mount, SPST, Tactile Switch; DIGIKEY_PART_NUMBER: 2223-TS04-66-50-BK-260-SMT-ND; MF: CUI Devices; MP: TS04-66-50-BK-260-SMT; PACKAGE: None; PURCHASE-URL: https://www.snapeda.com/api/url_track_click_mouser/?unipart_id=8666142&manufacturer=CUI Devices&part_name=TS04-66-50-BK-260-SMT&search_term=None; SNAPEDA_LINK: https://www.snapeda.com/parts/TS04-66-50-BK-260-SMT/CUI+Devices/view-part/?ref=snap
U1 U2 U4 U5 = ESE323_Project_Library; COPYRIGHT: Copyright (C) 2023 Ultra Librarian. All rights reserved.; MANUFACTURER_PART_NUMBER: AD8565AKSZ-REEL7; MFR_NAME: Analog Devices Inc
U3 = ESE323_Project_Library; COPYRIGHT: Copyright (C) 2023 Ultra Librarian. All rights reserved.; MANUFACTURER_PART_NUMBER: LTC6910-3CTS8#TRMPBF; MFR_NAME: Analog Devices Inc
U6 = ESE323_Project_Library; COPYRIGHT: Copyright (C) 2023 Ultra Librarian. All rights reserved.; MANUFACTURER_PART_NUMBER: ADG1419BRMZ-REEL7; MFR_NAME: Analog Devices Inc
U7 = ESE323_Project_Library; COPYRIGHT: Copyright (C) 2023 Ultra Librarian. All rights reserved.; MANUFACTURER_PART_NUMBER: LMV331W5-7; MFR_NAME: Diodes Inc
U8 = ESE323_Project_Library; COPYRIGHT: Copyright (C) 2023 Ultra Librarian. All rights reserved.; MANUFACTURER_PART_NUMBER: AZ1117CH-3.3TRG1; MFR_NAME: Diodes Inc
U9 = ESE323_Project_Library; COPYRIGHT: Copyright (C) 2023 Ultra Librarian. All rights reserved.; MANUFACTURER_PART_NUMBER: AD7819YRZ; MFR_NAME: Analog Devices Inc
U10 = ESE323_Project_Library; CHECK_PRICES: https://www.snapeda.com/parts/SN74LVC1G125DCKR/Texas+Instruments/view-part/?ref=eda; DESCRIPTION: Single 1.65-V to 5.5-V buffer with 3-state outputs; DIGIKEY_PART_NUMBER: 296-11604-2-ND; MF: Texas Instruments; MP: SN74LVC1G125DCKR; PACKAGE: SC70-5 Texas Instruments; PURCHASE-URL: https://www.snapeda.com/api/url_track_click_mouser/?unipart_id=105725&manufacturer=Texas Instruments&part_name=SN74LVC1G125DCKR&search_term=None; SNAPEDA_LINK: https://www.snapeda.com/parts/SN74LVC1G125DCKR/Texas+Instruments/view-part/?ref=snap
U11 = ESE323_Project_Library; COPYRIGHT: Copyright (C) 2023 Ultra Librarian. All rights reserved.; MANUFACTURER_PART_NUMBER: DSC1001BE2-001.6000; MFR_NAME: Microchip
U12 = ESE323_Project_Library; CHECK_PRICES: https://www.snapeda.com/parts/ESP32-WROOM-32/Espressif+Systems/view-part/?ref=eda; DESCRIPTION: Bluetooth, WiFi 802.11b/g/n, Bluetooth v4.2 +EDR, Class 1, 2 and 3 Transceiver Module 2.4GHz ~ 2.5GHz Antenna Not Included, U.FL Surface Mount; MF: Espressif Systems; MP: ESP32-WROOM-32; PACKAGE: Non Standard Espressif Systems; SNAPEDA_LINK: https://www.snapeda.com/parts/ESP32-WROOM-32/Espressif+Systems/view-part/?ref=snap
U13 = ESE323_Project_Library; CHECK_PRICES: https://www.snapeda.com/parts/CP2102N-A02-GQFN28R/Silicon+Labs/view-part/?ref=eda; DESCRIPTION: USB Bridge, USB to UART USB 2.0 UART Interface 28-QFN (5x5); DIGIKEY_PART_NUMBER: 336-5890-2-ND; MF: Silicon Labs; MP: CP2102N-A02-GQFN28R; PACKAGE: None; PURCHASE-URL: https://www.snapeda.com/api/url_track_click_mouser/?unipart_id=3595518&manufacturer=Silicon Labs&part_name=CP2102N-A02-GQFN28R&search_term=None; SNAPEDA_LINK: https://www.snapeda.com/parts/CP2102N-A02-GQFN28R/Silicon+Labs/view-part/?ref=snap
U14-U16 = ESE323_Project_Library; COPYRIGHT: Copyright (C) 2023 Ultra Librarian. All rights reserved.; MANUFACTURER_PART_NUMBER: SN74LVC2G74DCUR; MFR_NAME: Texas Instruments
USB1 = ESE323_Project_Library; CHECK_PRICES: https://www.snapeda.com/parts/1050170001/Molex/view-part/?ref=eda; DESCRIPTION: USB - micro B USB 2.0 Receptacle Connector 5 Position Surface Mount, Right Angle; Through Hole; DIGIKEY_PART_NUMBER: WM1399TR-ND; MF: Molex; MP: 1050170001; PACKAGE: None; PURCHASE-URL: https://www.snapeda.com/api/url_track_click_mouser/?unipart_id=2755530&manufacturer=Molex&part_name=1050170001&search_term=None; SNAPEDA_LINK: https://www.snapeda.com/parts/1050170001/Molex/view-part/?ref=snap

## Nets
!DRDY: U9.6 U10.4 U12.21
+3.3V: C7.1 C8.2 C9.2 C10.2 C19.2 D1.1 J4.1 J4.8 R3.3 R4.2 R14.2 R19.2 R24.3 R25.3 R26.3 R27.3 R28.3 R29.2 R30.2 R33.2 U1.2 U2.2 U3.8 U4.2 U5.2 U6.4 U7.5 U8.2 U8.4 U9.1 U9.16 U10.5 U11.1 U11.4 U12.2 U13.6 U13.7 U14.8 U15.8 U16.8
+5V_VBUS: C12.2 D8.1 J3.1 R16.2 R17.2 U8.3
D0: U9.8 U12.11
D1: U9.9 U12.10
D2: U9.10 U12.9
D3: U9.11 U12.8
D4: U9.12 U12.7
D5: U9.13 U12.6
D6: U9.14 U12.5
D7: U9.15 U12.4
DC_BIAS: C14.2 R23.1 U12.14
DC_OFFSET: C6.2 R8.1 R11.1 U2.1 U2.4 U12.36
DC_OFFSET_SELECT: C16.2 R30.1 S2.3 U6.6 U12.22
DTR: Q2.2 R31.1 U13.28
EN: C15.2 C18.2 Q1.3 R29.1 RESET.3 U12.3
GND: C2.1 C5.1 C6.1 C7.2 C8.1 C9.1 C10.1 C11.1 C12.1 C13.1 C14.1 C15.1 C16.1 C17.1 C18.1 C19.1 D2.2 D4.1 D5.1 D6.1 D7.1 J2.1 J3.2 J3.3 J4.2 J4.3 R2.1 R3.1 R5.1 R7.1 R12.1 R18.1 R20.2 R24.1 R25.1 R26.1 R27.1 R28.1 RESET.2 S2.2 S3.2 U1.5 U2.5 U3.4 U4.5 U5.5 U6.3 U6.7 U7.2 U8.1 U9.3 U9.5 U10.1 U10.3 U11.2 U12.1 U12.15 U12.38 U12.39_1 U12.39_2 U12.39_3 U12.39_4 U12.39_5 U12.39_6 U12.39_7 U12.39_8 U12.39_9 U12.39_10 U12.39_11 U12.39_12 U12.39_13 U12.39_14 U12.39_15 U12.39_16 U12.39_17 U12.39_18 U12.39_19 U12.39_20 U12.39_21 U13.3 U13.29 U14.4 U15.4 U16.4 USB1.5 USB1.SH1 USB1.SH2 USB1.SH3 USB1.SH4 USB1.SH5 USB1.SH6
INPUT: C1.1 D1.2 D2.1 J1.1 J1.2 J1.3 J1.4 R1.1
IO0: C17.2 Q2.3 R33.1 S3.3 U12.25
LCD_DC: J4.5 U12.24
LCD_RST: J4.4 U12.26
MISO: J4.9 U12.31
MOSI: J4.6 U12.37
N$1: C4.2 U3.3
N$2: C3.2 D3.2 U1.3
N$4: R6.2 R7.2 U4.3
N$5: R3.2 U2.3
N$8: Q1.1 R31.2
N$9: C1.2 C2.2 C3.1 R1.2 R2.2
N$10: C5.2 U3.2
N$11: R8.2 R9.1 U4.4
N$12: D4.2 R16.1
N$13: R10.2 R11.2 U5.3
N$14: R12.2 R13.1 U5.4
N$15: R9.2 U4.1 U6.8
N$16: D3.1 R4.1 R5.2
N$17: R13.2 U5.1 U6.2
N$18: R17.1 R18.2 U13.8
N$19: R32.2 R34.1
N$20: R19.1 U13.9
N$21: R20.1 U13.11
N$22: Q2.1 R34.2
N$23: C4.1 R23.2 U1.1 U1.4
N$24: R22.2 U12.34
N$25: C11.2 R15.2 U9.2
N$26: U9.7 U10.2
N$27: R21.2 U12.35
N$28: C13.2 D7.2 D8.2 USB1.1
N$29: U14.2 U14.3
N$30: U15.2 U15.3
N$31: U16.2 U16.3
N$32: U11.3 U14.1
N$33: U14.5 U15.1
N$34: U15.5 U16.1
PREAMP: R6.1 R10.1 U3.1
PREAMP_BIT0: U3.5 U12.18
PREAMP_BIT1: U3.6 U12.17
PREAMP_BIT2: U3.7 U12.16
RTS: Q1.2 R32.1 U13.24
RXD: R22.1 U13.25
SAMPLING_CLK: U9.4 U16.5
SIGNAL: R15.1 U6.1 U7.1
SPI_CLK: J4.7 U12.30
T/DIV: R25.2 U12.23
TRIGGER_LEVEL: R26.2 U7.3 U12.13
TRIGGER_STATUS: R14.1 U7.4 U12.19
TXD: R21.1 U13.26
USB_DN: D6.2 U13.5 USB1.2
USB_DP: D5.2 U13.4 USB1.3
V/DIV: R24.2 U12.12
X_CURSOR: R27.2 U12.27
Y_CURSOR: R28.2 U12.33

## Tracks (layer width: path | path; a pad name or v marks a point on that pad's centre or on a via)
!DRDY  (via drill 0.35)
  Top 0.152: U9.6 60.33,54.23 62.74,51.82 70.87,51.82 72.9,53.85 72.9,58.67 71.37,60.2 | U10.4 66.33,57.53 65.41,57.53 65.02,57.91 65.02,59.44 65.79,60.2 71.37,60.2 | v72.39,67.56 71.88,67.56 71.37,67.06 71.37,60.2 | U12.21 68.71,79.63 v69.09,79.25
  Bottom 0.152: v72.39,67.56 72.39,76.96 70.1,79.25 v69.09,79.25
+3.3V  (via drill 0.35)
  Top 0.152: U8.4 15.75,53.09 | 15.75,53.09 U8.2 | C9.2 17.53,47.5 16.51,47.5 15.75,48.26 | 15.75,48.26 15.75,53.09 | C8.2 16.51,44.7 15.75,45.47 | 15.75,45.47 15.75,48.26 | 34.04,39.12 D1.1 37.96,37.96 | 34.04,39.12 29.97,43.18 16.76,43.18 15.75,44.2 15.75,45.47 | 59.9,12.91 U3.8 57.62,12.91 57.15,12.45 57.15,10.41 55.63,8.89 43.18,8.89 | 59.9,12.91 62.23,15.24 R33.2 61.99,17.53 60.96,17.53 59.94,18.54 59.94,26.42 58.17,28.19 58.17,29.72 57.66,30.23 U4.2 55.37,30.23 51.82,33.78 51.82,34.29 52.11,34.59 U6.4 54.14,34.59 54.36,34.8 54.36,46.99 53.98,47.37 53.98,48.26 | R30.2 91.19,12.17 | 91.19,25.4 88.39,28.19 R29.2 86.89,30.72 85.09,32.51 U2.2 | R14.2 39.12,39.12 37.96,37.96 | 37.96,37.96 45.26,37.96 45.4,38.1 | 34.04,39.12 34.04,46.48 43.19,55.63 C10.2 50.55,54.36 51.31,53.59 53.85,53.59 | 50.62,65.46 U12.2 | 50.62,65.46 53.98,62.1 U9.16 U9.1 53.98,53.72 53.85,53.59 | R19.2 38.35,78.99 38.86,78.49 38.86,68.83 41.15,66.55 | 25.91,72.39 C7.1 | 50.62,65.46 49.53,66.55 41.15,66.55 | 41.15,66.55 38.86,66.55 v38.35,67.06 | v34.8,67.06 31.24,67.06 25.91,72.39 | U1.2 45.97,14.22 46.48,13.72 46.48,12.19 43.18,8.89 | 43.18,8.89 37.08,8.89 35.81,10.16 35.81,11.18 36.32,11.68 R4.2 | 85.85,4.83 91.19,10.16 91.19,12.17 | 85.85,4.83 73.66,4.83 65.57,12.91 59.9,12.91 | U5.2 46.74,28.96 45.4,30.29 45.4,38.1 | 45.4,38.1 U7.5 | 98.04,4.83 85.85,4.83 | 98.04,4.83 119.38,4.83 119.38,5.84 | 151.64,26.92 151.64,39.12 145.29,45.47 145.29,57.15 | 151.64,26.92 151.64,9.65 147.83,5.84 141.73,5.84 | J4.8 153.42,74.93 154.43,73.91 154.43,58.42 153.16,57.15 J4.1 145.29,57.15 | U10.5 65.64,56.25 v65.02,55.63 | 53.98,48.26 v55.12,48.26
  Top 0.152: 145.29,57.15 134.37,57.15 | 134.37,57.15 132.84,58.67 U11.4 | U11.4 U11.1 132.93,63.75 134.62,63.75 135.13,64.26 | U14.8 122.95,59.19 122.68,58.93 122.68,57.91 123.44,57.15 | 123.44,57.15 134.37,57.15 | 123.44,57.15 117.35,57.15 | 117.35,57.15 116.33,58.17 116.33,58.93 116.6,59.19 U15.8 | 117.35,57.15 109.73,57.15 108.97,57.91 108.97,58.67 109.47,59.18 110.28,59.18 U16.8 | 135.13,64.26 C19.2 | U11.4 132.93,61.72 134.62,61.72 135.13,62.23 135.13,64.26 | 24.61,72.41 24.13,72.9 24.13,73.78 U13.6 U13.7 24.61,72.41 | 25.91,72.39 24.64,72.39 24.61,72.41 | 53.98,48.26 53.98,53.47 53.85,53.59 | 151.64,26.92 145.27,26.92 R28.3 | 91.19,12.17 91.19,25.4 | 91.19,25.4 99.68,25.4 R3.3 | R26.3 99.81,6.59 98.04,4.83 | 119.38,5.84 141.73,5.84 | R27.3 141.73,8.14 141.73,5.84 | R25.3 119.13,25.15 114.3,20.32 114.3,10.16 115.76,8.7 119.57,8.7 | R24.3 120.78,9.91 119.57,8.7 | 119.57,8.7 119.38,8.51 119.38,5.84
  Bottom 0.152: v38.35,67.06 v34.8,67.06 | v65.02,55.63 65.02,50.8 62.48,48.26 v55.12,48.26
+5V_VBUS  (via drill 0.35)
  Top 0.152: 15.95,73.71 13.72,73.71 | 15.95,73.71 17.88,71.78 17.88,69.09 20.57,69.09 | 23.11,69.09 20.57,69.09 | C12.2 23.11,69.09 | 13.72,73.71 13.72,79.76 19.68,85.72 22.73,85.72 23.88,86.87 23.88,88.65 22.35,90.17 J3.1 | 21.08,55.39 25.16,55.39 37.34,67.56 R17.2 | 21.08,55.39 U8.3 | 15.95,73.71 17.98,73.71 20.57,71.12 20.57,69.09 | v21.08,59.69 21.08,58.93 | 21.08,58.93 20.83,58.67 R16.2 | 21.08,58.93 21.08,55.39 | v25.65,67.56 24.13,69.09 23.11,69.09 | D8.1 13.66,73.66 13.72,73.71
  Bottom 0.152: v21.08,59.69 24.13,59.69 26.67,62.23 26.67,66.55 v25.65,67.56
D0
  Top 0.152: U12.11 62.05,67.56 64.3,65.31 64.3,59.22 62.87,57.78 U9.8
D1
  Top 0.152: U9.9 62.87,64.74 60.78,66.83 U12.10
D2
  Top 0.152: U9.10 61.59,64.31 59.51,66.4 U12.9
D3
  Top 0.152: U9.11 60.35,60.66 60.35,63.86 58.22,65.99 58.22,69.2 U12.8
D4
  Top 0.152: U9.12 59.05,63.27 56.97,65.36 U12.7
D5
  Top 0.152: U12.6 55.7,65.38 57.78,63.29 U9.13
D6
  Top 0.152: U12.5 54.43,64.95 56.52,62.86 U9.14
D7
  Top 0.152: U12.4 53.16,64.52 55.24,62.43 U9.15
DC_BIAS  (via drill 0.35)
  Top 0.152: C14.2 48.38,21.22 R23.1 44.69,21.1 43.94,21.84 v43.94,23.37 | v67.82,66.8 66.8,66.8 65.86,67.74 U12.14
  Bottom 0.152: v43.94,23.37 43.94,36.32 39.88,40.39 39.88,50.29 50.55,60.96 50.55,65.79 56.64,71.88 67.06,71.88 67.82,71.12 v67.82,66.8
DC_OFFSET  (via drill 0.35)
  Top 0.152: v86.36,40.64 86.25,40.64 85.74,40.13 U2.4 84.44,37.81 U2.1 84.44,36.18 83.82,35.56 81.79,35.56 81.28,36.07 C6.2 68.83,37.33 64.77,33.27 64.77,24.89 63.75,23.88 v63.25,23.88 62.61,24.51 R8.1 | U12.36 51.89,87.96 v52.32,88.39 | R11.1 48.39,22.99 v48.77,22.61
  Bottom 0.152: v52.32,88.39 52.32,84.07 53.09,83.31 121.16,83.31 125.86,78.61 125.86,46.1 v125.73,45.97 125.73,44.2 123.44,41.91 87.63,41.91 v86.36,40.64 | v48.77,22.61 52.32,22.61 53.59,21.34 59.18,21.34 61.72,23.88 v63.25,23.88
DC_OFFSET_SELECT  (via drill 0.35)
  Top 0.152: v96.52,45.47 72.9,45.47 66.04,38.61 56.13,38.61 55.37,37.85 55.37,35.81 55.95,35.23 U6.6 58.49,35.23 v58.93,34.8 | U12.22 69.53,80.9 69.6,80.83 72.59,80.83 v96.77,56.64 | S2.3 82.01,12.16 | 82.01,12.16 83.58,13.73 | 83.58,13.73 R30.1 C16.2 84.07,15.99 83.57,15.49 83.58,15.48 83.58,13.73 | v79.25,14.48 79.25,13.97 81.06,12.16 82.01,12.16
  Bottom 0.152: v96.52,45.47 96.77,45.47 99.31,48.01 99.31,54.1 v96.77,56.64 | v58.93,34.8 77.47,34.8 78.74,33.53 78.74,14.99 v79.25,14.48
DTR  (via drill 0.35)
  Top 0.152: Q2.2 82.04,87.56 83.31,86.29 v83.31,80.52 R31.1 | U13.28 19.58,74.7 v19.3,74.42 | v37.08,88.14 37.34,88.39 42.42,88.39 v42.93,87.88
  Bottom 0.152: v83.31,80.52 52.58,80.52 50.8,82.3 50.8,88.65 49.69,89.76 44.8,89.76 v42.93,87.88 | v19.3,74.42 18.29,74.42 17.78,74.93 17.78,79.76 20.07,82.04 32.61,82.04 37.08,86.52 v37.08,88.14
EN  (via drill 0.35)
  Top 0.152: Q1.3 75.69,30.73 | C18.2 74.68,27.18 75.69,28.19 75.69,30.73 | U12.3 51.89,65.71 v52.32,65.28 | 75.69,30.73 75.69,32 | 75.69,32 v75.18,32.51 | 75.69,32 76.48,31.22 RESET.3 77.51,29.17 78.49,28.19 R29.1 C15.2
  Bottom 0.152: v52.32,65.28 52.32,55.12 42.67,45.47 42.67,41.15 46.61,37.21 49.91,37.21 54.36,32.77 74.93,32.77 v75.18,32.51
GND  (via drill 0.35)
  Top 0.152: J2.1 34.29,22.1 D2.2 35.8,21.06 | 35.8,21.06 36.54,20.32 R2.1 | C2.1 36.3,17.78 35.8,18.29 | R5.1 36.32,14.73 35.8,15.26 35.8,18.29 | 35.8,18.29 35.8,21.06 | U1.5 42.28,13.57 41.91,13.21 v41.91,12.19 | C5.1 52.07,16.76 v52.32,17.02 | U3.4 55.77,10.92 55.12,10.92 v54.86,10.67 | RESET.2 82.04,22.12 85.83,22.12 | 85.83,22.12 86.61,21.34 C16.1 | 85.83,22.12 87.35,22.12 v87.63,21.84 | U10.1 69.99,56.25 v70.61,55.63 | U9.3 56.52,54.48 v56.9,54.1 | U8.1 19.83,50.79 21.34,49.28 21.34,47.24 | 21.34,47.24 21.34,44.7 | C8.1 21.34,44.7 | C9.1 21.34,47.24 | 21.34,44.7 21.59,44.7 v21.84,44.45 | D5.1 12.7,61.72 | 12.45,61.72 12.45,58.84 D4.1 11.68,58.67 v11.18,58.17 | D7.1 17.91,62.87 16.76,61.72 | 12.45,61.72 12.7,61.72 | 12.7,61.72 14.48,61.72 | 14.48,61.72 16.76,61.72 | 16.76,61.72 19.05,61.72 | 19.05,61.72 20.83,61.72 23.11,64.01 C12.1 | C13.1 20.57,63.25 19.05,61.72 | D6.1 15.24,62.48 14.48,61.72 | USB1.SH2 10.12,69.89 10.67,69.34 | 10.67,69.34 10.67,63.5 | 12.45,61.72 10.67,63.5 | v22.1,72.39 22.61,72.91 U13.3 22.61,75.7 U13.29 | R18.1 36.31,76.19 v36.07,75.95 | C7.2 v31.5,72.39 | U12.1 47.28,67.16 v47.24,67.16 | U12.38 49.35,87.81 48.77,88.39 v47.5,88.39 | U12.15 69.22,72.01 v69.85,71.37 | C11.1 v52.42,42.93 | C17.1 v64.52,16.78 | C10.1 v50.55,58.16 | v51.44,18.68 C14.1 | C15.1 v87.87,25.91 | C18.1 v71.13,27.18 | C6.1 v81.28,39.87 | U7.2 v44.45,42.82 | v52.32,31.11 52.83,30.61 R12.1 50.8,29.86 U5.5 | R20.2 v30.48,80.01 | R7.1 v58.29,22.99 | v59.05,54.38 U9.5 | U10.3 v69.4,57.55 | U2.5 v84.44,39.98 | U4.5 v59.92,30.88 | S2.2 77.04,15.52 73.91,15.52 | 73.91,15.52 S3.2 | U6.3 51.49,35.23 v50.55,34.29 | U6.7 60.27,35.88 v60.71,36.32 | U12.39_9 U12.39_19
  Top 0.152: U12.39_6 U12.39_14 U12.39_3 | U12.39_5 U12.39_3 | U12.39_2 U12.39_6 | U12.39_5 56.9,76.72 | 56.9,76.72 U12.39_8 | U12.39_9 U12.39_5 | U12.39_6 U12.39_8 | U12.39_7 U12.39_20 U12.39_8 | U12.39_5 U12.39_16 U12.39_6 | U12.39_9 U12.39_21 U12.39_8 | U12.39_7 U12.39_17 U12.39_4 | U12.39_4 U12.39_12 U12.39_1 | U12.39_2 U12.39_13 U12.39_5 | U12.39_2 U12.39_10 U12.39_1 | U12.39_3 U12.39_11 U12.39_2 | U12.39_5 U12.39_1 | U12.39_4 U12.39_2 | U12.39_4 U12.39_8 | U12.39_7 56.9,76.68 56.9,76.72 | U11.2 130.3,65.79 | U14.4 126.71,60.71 127.51,60.71 128.02,61.21 128.02,65.79 | U15.4 121.15,60.69 121.92,61.47 121.92,65.79 | 128.02,65.79 130.3,65.79 | 128.02,65.79 121.92,65.79 | 121.92,65.79 118.62,65.79 113.53,60.69 U16.4 | 130.3,65.79 131.57,67.06 131.57,67.31 | 131.57,67.31 v131.57,68.58 | C19.1 131.58,67.32 131.57,67.31 | USB1.SH3 USB1.SH4 USB1.SH5 USB1.SH6 6.53,67.64 10.67,63.5 | 10.67,69.34 10.67,70.61 10.19,71.09 USB1.5 | v145.54,29.97 145.29,30.23 R28.1 | R27.1 145.29,14.99 v146.05,14.22 | 73.91,15.52 73.91,16 v74.68,16.76
  Bottom 0.152: v145.54,29.97 145.54,12.55
  pour Bottom: 160,0 0,0 0,100 160,100
INPUT
  Top 0.152: J1.2 J1.4 J1.3 J1.1 | J1.2 J1.1 | 34.29,26.54 D2.1 34.56,23.5 C1.1 | R1.1 34.29,26.54 | D1.2 34.04,35.31 32.77,34.04 J1.1 | J1.2 31.88,26.54 34.29,26.54
IO0  (via drill 0.35)
  Top 0.152: v67.82,26.67 67.35,26.2 S3.3 67.35,22.9 66.29,21.84 64.56,21.84 64.52,21.8 | v66.55,88.14 66.29,88.14 65.86,87.7 | Q2.3 72.39,86.61 69.85,89.15 66.29,89.15 65.86,88.72 65.86,87.7 | C17.2 64.52,21.8 | R33.1 62.23,20.83 | 62.23,20.83 63.2,21.8 64.52,21.8 | U12.25 65.86,87.7 | 62.23,20.83 61.47,20.83 v60.96,20.32
  Bottom 0.152: v66.55,88.14 69.6,88.14 70.36,87.38 70.36,86.36 68.33,84.33 55.12,84.33 54.36,85.09 54.36,89.15 52.58,90.93 43.94,90.93 40.13,87.12 40.13,62.99 33.83,56.69 33.83,43.64 42.42,35.05 42.42,21.84 44.07,20.19 60.83,20.19 v60.96,20.32
LCD_DC  (via drill 0.35)
  Top 0.152: U12.24 73.03,83.44 89.15,67.31 96.9,75.06 131.44,75.06 v139.19,67.31 | J4.5 v144.27,67.31
  Bottom 0.152: v144.27,67.31 v139.19,67.31
LCD_RST
  Top 0.152: U12.26 64.59,88.97 65.49,89.87 133.9,89.87 137.92,85.85 137.92,77.22 141.48,73.66 141.48,66.55 143.26,64.77 J4.4
MISO
  Top 0.152: J4.9 151.03,77.52 150.95,77.6 141.86,77.6 140.97,78.49 140.97,90.17 137.56,93.58 61.32,93.58 58.24,90.5 U12.31
MOSI  (via drill 0.35)
  Top 0.152: J4.6 144.27,69.85 144.02,70.1 v144.02,71.37 | U12.37 50.55,86.3 50.55,88.91 47.96,91.5 47.96,95.7 48.92,96.67 138.46,96.67 144.02,91.11 v144.02,78.99
  Bottom 0.152: v144.02,71.37 v144.02,78.99
N$1
  Top 0.152: U3.3 55.75,11.56 51.32,11.56 C4.2
N$2
  Top 0.152: C3.2 47.28,17.78 D3.2 47.8,17.26 47.99,17.26 48.26,16.99 48.26,16 47.13,14.87 U1.3
N$4
  Top 0.152: U4.3 56.39,29.58 55.5,28.69 55.5,27.18 | R6.2 55.5,27.18 | 55.5,27.18 57.66,27.18 58.29,26.54 R7.2
N$5
  Top 0.152: U2.3 85.74,33.64 91.39,27.99 97.09,27.99 R3.2
N$8  (via drill 0.35)
  Top 0.152: Q1.1 70.93,31.68 70.61,32 v70.61,36.58 | v77.47,57.4 75.95,57.4 72.69,60.66 72.69,64.31 74.42,66.04 v76.71,66.04 | v89.15,73.91 90.68,73.91 91.44,74.68 91.44,79.25 90.17,80.52 R31.2
  Bottom 0.152: v70.61,36.58 77.47,43.43 v77.47,57.4 | v76.71,66.04 84.33,73.66 88.9,73.66 v89.15,73.91
N$9
  Top 0.152: R1.2 40.22,23.83 C1.2 39.88,20.62 40.15,20.35 R2.2 40.15,17.89 C2.2 40.31,17.73 42.42,17.73 C3.1
N$10
  Top 0.152: U3.2 53.78,12.26 52.07,13.97 C5.2
N$11
  Top 0.152: U4.4 62.48,29.57 | R9.1 62.48,29.57 | R8.2 62.72,29.34 62.48,29.57
N$12
  Top 0.152: R16.1 D4.2
N$13
  Top 0.152: R10.2 R11.2 48.28,25.65 47.24,25.65 46.74,26.16 46.74,27.69 47.36,28.31 U5.3
N$14
  Top 0.152: R12.2 U5.4 49.93,28.31 49.66,28.57 49.66,31.61 R13.1
N$15
  Top 0.152: U6.8 57.41,36.58 59.44,36.58 60.45,37.59 62.23,37.59 63.25,36.58 63.25,33.53 62.23,32.51 | U4.1 56.25,30.88 55.88,31.24 55.88,32 56.39,32.51 62.23,32.51 | R9.2 62.66,32.08 62.23,32.51
N$16
  Top 0.152: 40,14.73 R5.2 R4.1 39.62,11.68 40,12.06 40,14.73 | 40,14.73 40,14.87 41.4,16.27 45.99,16.27 46.48,16.76 47.61,16.76 D3.1
N$17
  Top 0.152: R13.2 47.88,32.13 46.99,33.02 | 46.99,33.02 46.99,34.8 48.08,35.88 U6.2 | U5.1 47.86,29.61 46.99,30.48 46.99,33.02
N$18
  Top 0.152: R17.1 R18.2 25.53,74.68 U13.8
N$19  (via drill 0.35)
  Top 0.152: R32.2 38.35,81.79 39.12,82.55 39.12,83.82 37.59,85.34 v33.27,85.34 | R34.1 85.85,94.74 v85.6,95
  Bottom 0.152: v33.27,85.34 29.46,89.15 29.46,91.69 33.02,95.25 85.34,95.25 v85.6,95
N$20
  Top 0.152: U13.9 30.5,75.2 34.29,78.99 R19.1
N$21
  Top 0.152: U13.11 30.23,76.2 30.48,76.45 R20.1
N$22
  Top 0.152: Q2.1 79.44,85.66 81.28,83.82 81.28,79.25 88.39,72.14 91.69,72.14 92.96,73.41 92.96,80.87 R34.2
N$23  (via drill 0.35)
  Top 0.152: R23.2 48.77,19.03 48.77,15.75 48,14.98 C4.1 48,11.17 v46.99,10.16 | v41.4,10.92 40.89,11.43 40.89,13.97 41.8,14.87 U1.4 43.19,14.87 44.49,13.57 U1.1
  Bottom 0.152: v41.4,10.92 42.16,10.16 v46.99,10.16
N$24
  Top 0.152: U12.34 54.43,93.65 53.34,94.74 R22.2
N$25
  Top 0.152: R15.2 55.14,42.86 C11.2 56.13,42.93 57.15,43.94 57.15,49 54.74,51.42 54.74,53.72 55.24,54.23 U9.2
N$26
  Top 0.152: U9.7 61.59,54.23 62.48,53.34 70.87,53.34 71.98,54.45 71.98,56.03 71.12,56.9 U10.2
N$27
  Top 0.152: U12.35 53.16,90.86 51.82,92.2 51.69,92.33 R21.2
N$28  (via drill 0.35)
  Top 0.152: USB1.1 11.87,73.69 D8.2 11.9,74.64 v12.19,74.93 | v16.51,67.31 17.27,67.31 | 17.27,67.31 17.91,66.67 D7.2 | 17.27,67.31 20.32,67.31 20.57,67.06 C13.2
  Bottom 0.152: v12.19,74.93 13.21,74.93 13.72,74.42 13.72,71.88 12.19,70.36 12.19,68.83 13.72,67.31 v16.51,67.31
N$29
  Top 0.152: U14.2 U14.3
N$30
  Top 0.152: U15.2 U15.3
N$31
  Top 0.152: U16.2 U16.3
N$32
  Top 0.152: U14.1 129.29,59.18 130.3,60.2 U11.3
N$33
  Top 0.152: U14.5 122.42,60.69 120.92,59.19 U15.1
N$34
  Top 0.152: U16.1 114.06,59.19 115.56,60.69 U15.5
PREAMP
  Top 0.152: R6.1 55.81,23.89 55.81,21.15 | R10.1 50.98,23.95 53.01,23.95 55.81,21.15 | 55.81,21.15 U3.1
PREAMP_BIT0  (via drill 0.35)
  Top 0.152: U3.5 59.65,10.96 60.45,10.16 v60.45,7.62 | U12.18 74.78,75.82 97.9,52.7 104.65,52.7 113.28,44.07 v113.28,39.62
  Bottom 0.152: v60.45,7.62 60.45,5.08 62.23,3.3 69.6,3.3 70.61,4.32 70.61,7.62 73.15,10.16 89.66,10.16 100.58,21.08 110.24,21.08 113.28,24.13 v113.28,39.62
PREAMP_BIT1  (via drill 0.35)
  Top 0.152: U12.17 67.45,73.96 73.11,73.96 95.86,51.21 103.89,51.21 111.51,43.59 v111.51,39.62 | U3.6 61.03,11.61 61.72,10.92 v61.72,7.62
  Bottom 0.152: v61.72,7.62 61.72,5.33 62.74,4.32 68.33,4.32 69.34,5.33 69.34,8.89 72.39,11.94 88.83,11.94 99.53,22.64 109.22,22.64 111.51,24.93 v111.51,39.62
PREAMP_BIT2  (via drill 0.35)
  Top 0.152: U12.16 67.45,72.69 72.35,72.69 95.33,49.71 103.38,49.71 110.24,42.85 110.24,39.88 v109.98,39.62 | U3.7 62.16,12.26 62.99,11.43 v62.99,7.62
  Bottom 0.152: v62.99,7.62 62.99,6.35 64.01,5.33 67.31,5.33 68.07,6.1 68.07,10.16 71.12,13.21 84.58,13.21 92.46,21.08 92.46,33.78 98.3,39.62 v109.98,39.62
RTS  (via drill 0.35)
  Top 0.152: U13.24 19.06,76.7 18.54,77.22 18.54,79.5 20.83,81.79 32.77,81.79 v33.27,81.28 33.78,81.79 R32.1 | Q1.2 72.08,29.72 70.87,29.72 v70.61,29.46 | v45.21,28.7 41.4,28.7 36.58,33.53 v36.58,36.07
  Bottom 0.152: v33.27,81.28 33.53,81.03 33.53,69.34 31.24,67.06 31.24,43.43 36.58,38.1 v36.58,36.07 | v70.61,29.46 69.85,28.7 v45.21,28.7
RXD
  Top 0.152: R22.1 45.08,94.74 42.34,92.91 42.34,91.11 41.91,90.68 36.07,90.68 29.46,84.07 20.57,84.07 15.49,78.99 15.49,77.98 17.27,76.2 U13.25
SAMPLING_CLK  (via drill 0.35)
  Top 0.152: U9.4 57.78,53.21 60.45,50.55 86.36,50.55 v88.39,52.58 | v99.31,58.67 101.33,60.69 U16.5
  Bottom 0.152: v88.39,52.58 94.49,58.67 v99.31,58.67
SIGNAL
  Top 0.152: U6.1 51.86,36.53 51.31,37.08 51.31,39.62 | 51.31,39.62 52.07,40.39 R15.1 | U7.1 45.4,42.86 45.72,43.18 50.29,43.18 50.42,43.05 51.31,42.16 51.31,39.62
SPI_CLK
  Top 0.152: U12.30 59.51,90.5 60.96,91.95 137.92,91.95 139.45,90.42 139.45,78.23 145.29,72.39 J4.7
T/DIV  (via drill 0.35)
  Top 0.152: v122.17,45.97 122.17,44.7 123.95,42.93 128.27,42.93 130.56,40.64 130.56,31.75 126.49,27.69 R25.2 | U12.23 69.12,82.17 v69.85,81.44
  Bottom 0.152: v122.17,45.97 122.17,77.22 117.95,81.44 v69.85,81.44
TRIGGER_LEVEL  (via drill 0.35)
  Top 0.152: U7.3 43.5,43.75 v44.45,44.7 | U12.13 64.59,67.96 v65.39,67.16 | v99.57,43.43 102.87,43.43 108.08,38.23 109.22,37.08 109.22,15.24 106.43,12.45 R26.2
  Bottom 0.152: 66.02,65.77 44.96,44.7 v44.45,44.7 | v65.39,67.16 65.39,66.4 66.02,65.77 | v99.57,43.43 89.62,43.43 85.34,47.71 85.34,52.83 72.41,65.77 66.02,65.77
TRIGGER_STATUS  (via drill 0.35)
  Top 0.152: v35.56,46.23 35.56,45.72 39.12,42.16 R14.1 40.37,41.42 41.4,40.39 41.4,39.5 42.29,38.61 43.18,38.61 43.5,38.93 U7.4 | v69.09,77.47 68.71,77.09 U12.19
  Bottom 0.152: v69.09,77.47 69.09,74.42 68.07,73.41 56.13,73.41 46.74,64.01 44.96,64.01 35.31,54.36 35.31,46.48 v35.56,46.23
TXD  (via drill 0.35)
  Top 0.152: U13.26 16.76,75.7 14.73,77.72 14.73,79.42 20.14,84.84 28.78,84.84 36.4,92.46 v40.13,92.46 | v44.45,92.46 46.99,92.46 R21.1
  Bottom 0.152: v40.13,92.46 v44.45,92.46
USB_DN  (via drill 0.35)
  Top 0.152: U13.5 23.62,73.79 23.62,72.39 24.38,71.63 v24.89,71.63 | USB1.2 13.07,73.04 | 13.07,73.04 15.24,70.87 D6.2 | 13.07,73.04 14.84,73.04 v15.24,72.64
  Bottom 0.152: v15.24,72.64 16.76,71.12 24.38,71.12 v24.89,71.63
USB_DP  (via drill 0.35)
  Top 0.152: USB1.3 11.43,72.39 12.7,71.12 | 12.7,71.12 D5.2 | U13.4 23.11,72.14 25.39,69.86 v25.39,69.84 | v13.72,69.6 13.72,70.1 12.7,71.12
  Bottom 0.152: v13.72,69.6 13.97,69.85 23.62,69.85 23.63,69.84 v25.39,69.84
V/DIV  (via drill 0.35)
  Top 0.152: U12.12 63.5,69.04 63.5,67.06 v66.29,64.26 | v73.66,61.98 v80.01,61.98 | v120.4,52.83 126.49,52.83 132.08,47.24 132.08,25.91 v130.56,24.38 | R24.2 128.51,12.45 129.26,11.68 v129.29,11.68
  Bottom 0.152: v129.29,11.68 131.83,14.22 131.83,23.11 v130.56,24.38 | v66.29,64.26 68.58,61.98 v73.66,61.98 | v80.01,61.98 101.85,61.98 110.87,52.96 120.27,52.96 v120.4,52.83
X_CURSOR  (via drill 0.35)
  Top 0.152: U12.27 63.32,87.96 v63.75,88.39 | v133.73,46.1 133.73,15.37 136.91,12.19 140.7,12.19 R27.2
  Bottom 0.152: v133.73,46.1 133.73,80.9 128.02,86.61 74.68,86.61 70.61,90.68 64.52,90.68 63.75,89.92 v63.75,88.39
Y_CURSOR  (via drill 0.35)
  Top 0.152: v136.65,46.1 136.4,45.85 136.4,30.23 138.94,27.69 R28.2 | U12.33 55.7,87.96 v56.13,88.39
  Bottom 0.152: v136.65,46.1 136.65,81.28 125.98,91.95 57.91,91.95 56.13,90.17 v56.13,88.39

## Text on the board
NamesTop: R34 | D5 | D6 | D7 | U9 | R15 | U7 | D1 | U6 | U2 | Y-CURSOR | DC OFFSET | TIME PER DIV | U4 | U5 | C15 | D2 | TRIGGER LEVEL | VOLTS PER DIV | X-CURSOR | D3 | OFFSET SELECT | U3 | U1